# EAGLE board Lightbox schematic_29OCT (EAGLE 9.2.0)

Size 200.64 x 207.95 mm. Coordinates in mm from the lower left corner, seen from the top.
Outline: 40.64,107.95 200.64,107.95 200.64,207.95 40.64,207.95 40.64,107.95
Copper layers (1*16): Top 0.035mm / dielectric 1.5mm / Bottom 0.035mm
Design rules "default": minimum track width 6mil, minimum drill 0.35mm, track to track 6mil, track to pad 6mil, pad to pad 6mil, via to via 6mil, smd to smd 6mil, copper to edge 40mil, drill to drill 6mil, minimum pad ring 10mil, minimum via ring 8mil, stop-mask expansion 4mil, vias tented up to drill 0mil, thermal gap 10mil

## Footprints (pad centres in the part's own frame; a part is rotated, then mirrored left to right if it is on the bottom)
LED_3MM = drill 0.813 pad 1.88: A -1.27,0; K 1.27,0
AB9V = drill 1.118 pad 3.15 octagon: + 0,2.54; - 0,-2.54
TO220H = drill 1.118 long: 1 -2.54,-10.16; 2 0,-10.16; 3 2.54,-10.16 | hole 3.302: 0,4.826
AXIAL-0.3 = drill 0.9 pad 1.88: P$1 -3.81,0; P$2 3.81,0
PUSHBUTTON_SMD_SJ = smd 2 x 2: P$1 3,0; P$2 -3,0
ARDUINOR3 = drill 1 pad 1.676 octagon: 3V 35.56,2.54; 5V 38.1,2.54; A0 50.8,2.54; A1 53.34,2.54; A2 55.88,2.54; A3 58.42,2.54; A4 60.96,2.54; A5 63.5,2.54; AREF 23.876,50.8; D0 63.5,50.8; D1 60.96,50.8; D2 58.42,50.8; D3 55.88,50.8; D4 53.34,50.8; D5 50.8,50.8; D6 48.26,50.8; D7 45.72,50.8; D8 41.656,50.8; D9 39.116,50.8; D10 36.576,50.8; D11 34.036,50.8; D12 31.496,50.8; D13 28.956,50.8; GND 26.416,50.8; GND1 43.18,2.54; GND2 40.64,2.54; IOREF 30.48,2.54; RESERVED 27.94,2.54; RESET 33.02,2.54; SCL 18.796,50.8; SDA 21.336,50.8; VIN 45.72,2.54

## Placement (x,y rotation side)
D1  [LED_3MM]  1.27,57.15 0 top
G1  AB9V  [AB9V]  13.97,72.39 0 top
IC2  7805T  [TO220H]  15.24,90.17 0 top
R1  100k  [AXIAL-0.3]  10.16,55.88 0 top
R2  100k  [AXIAL-0.3]  3.81,-3.81 0 top  (outside the outline)
SW1  [PUSHBUTTON_SMD_SJ]  3.81,-8.89 0 top  (outside the outline)
U1  ARDUINOR3-DIMENSION  [ARDUINOR3]  0,0 0 top

## Library data of the parts
D1 = SparkFun-LED; PROD_ID: DIO-08794
G1 = battery
IC2 = linear
R1 R2 = SparkFun-Resistors; PROD_ID: RES-12184
SW1 U1 = adafruit

## Nets
3V: U1.3V
5V: IC2.3 SW1.P$2
GND: D1.K G1.- IC2.2 R1.P$1 U1.GND
GND1: U1.GND1
GND2: U1.GND2
N$1: G1.+ IC2.1
N$2: R1.P$2 SW1.P$1 U1.D0
N$3: R2.P$2 U1.D11
N$4: D1.A R2.P$1
N$7: U1.5V
VIN: U1.VIN

## Tracks (layer width: path | path; a pad name or v marks a point on that pad's centre or on a via)
5V  (1 unrouted)
GND  (4 unrouted)
N$1  (1 unrouted)
N$2  (2 unrouted)
N$3  (1 unrouted)
N$4  (1 unrouted)